# Allegro board NUCLEO-F446RE_BOOSTPACK.brd
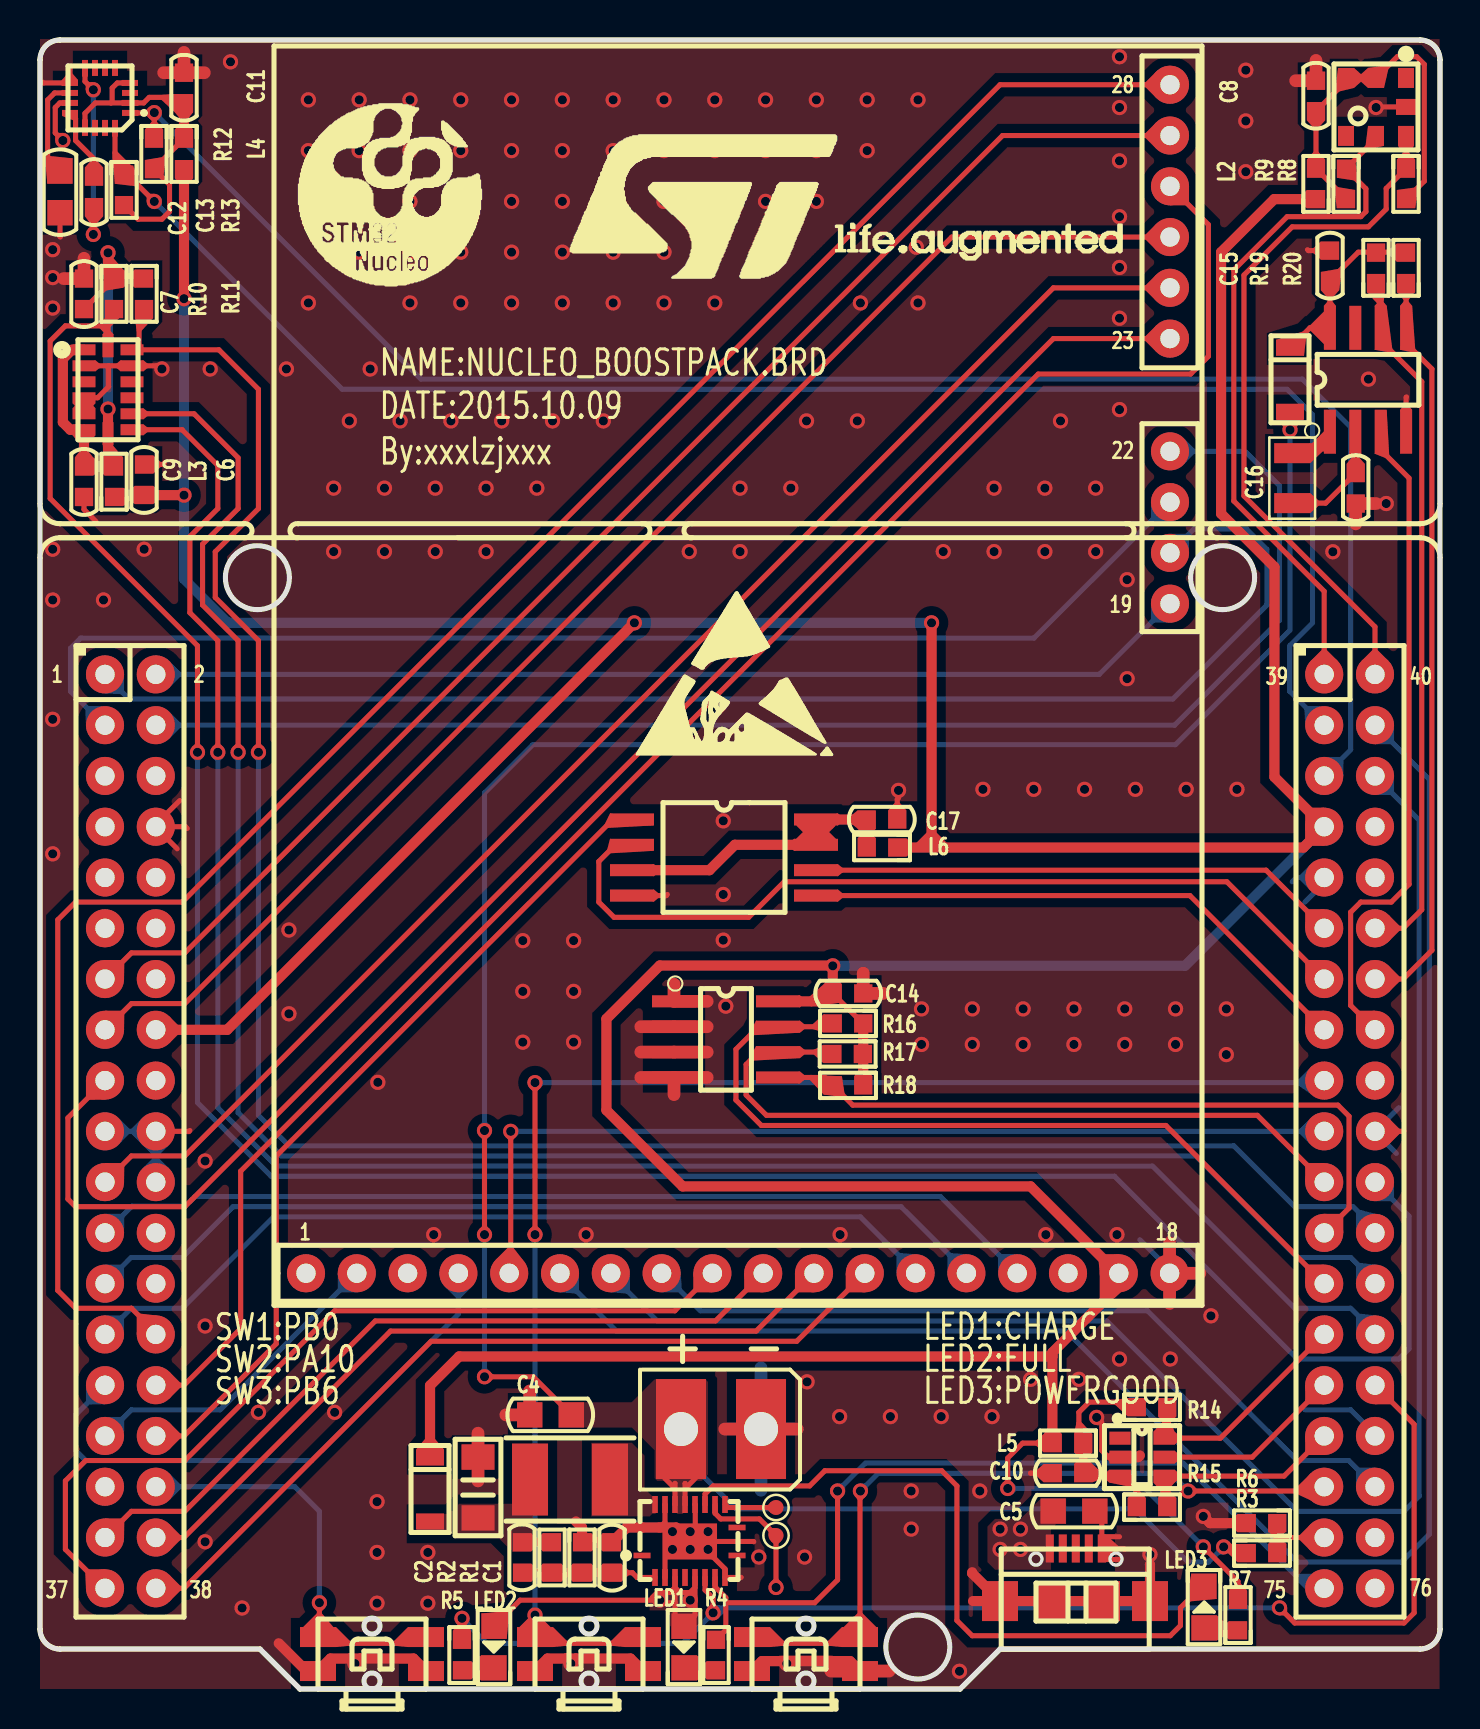
[diagram p0: board, top side]
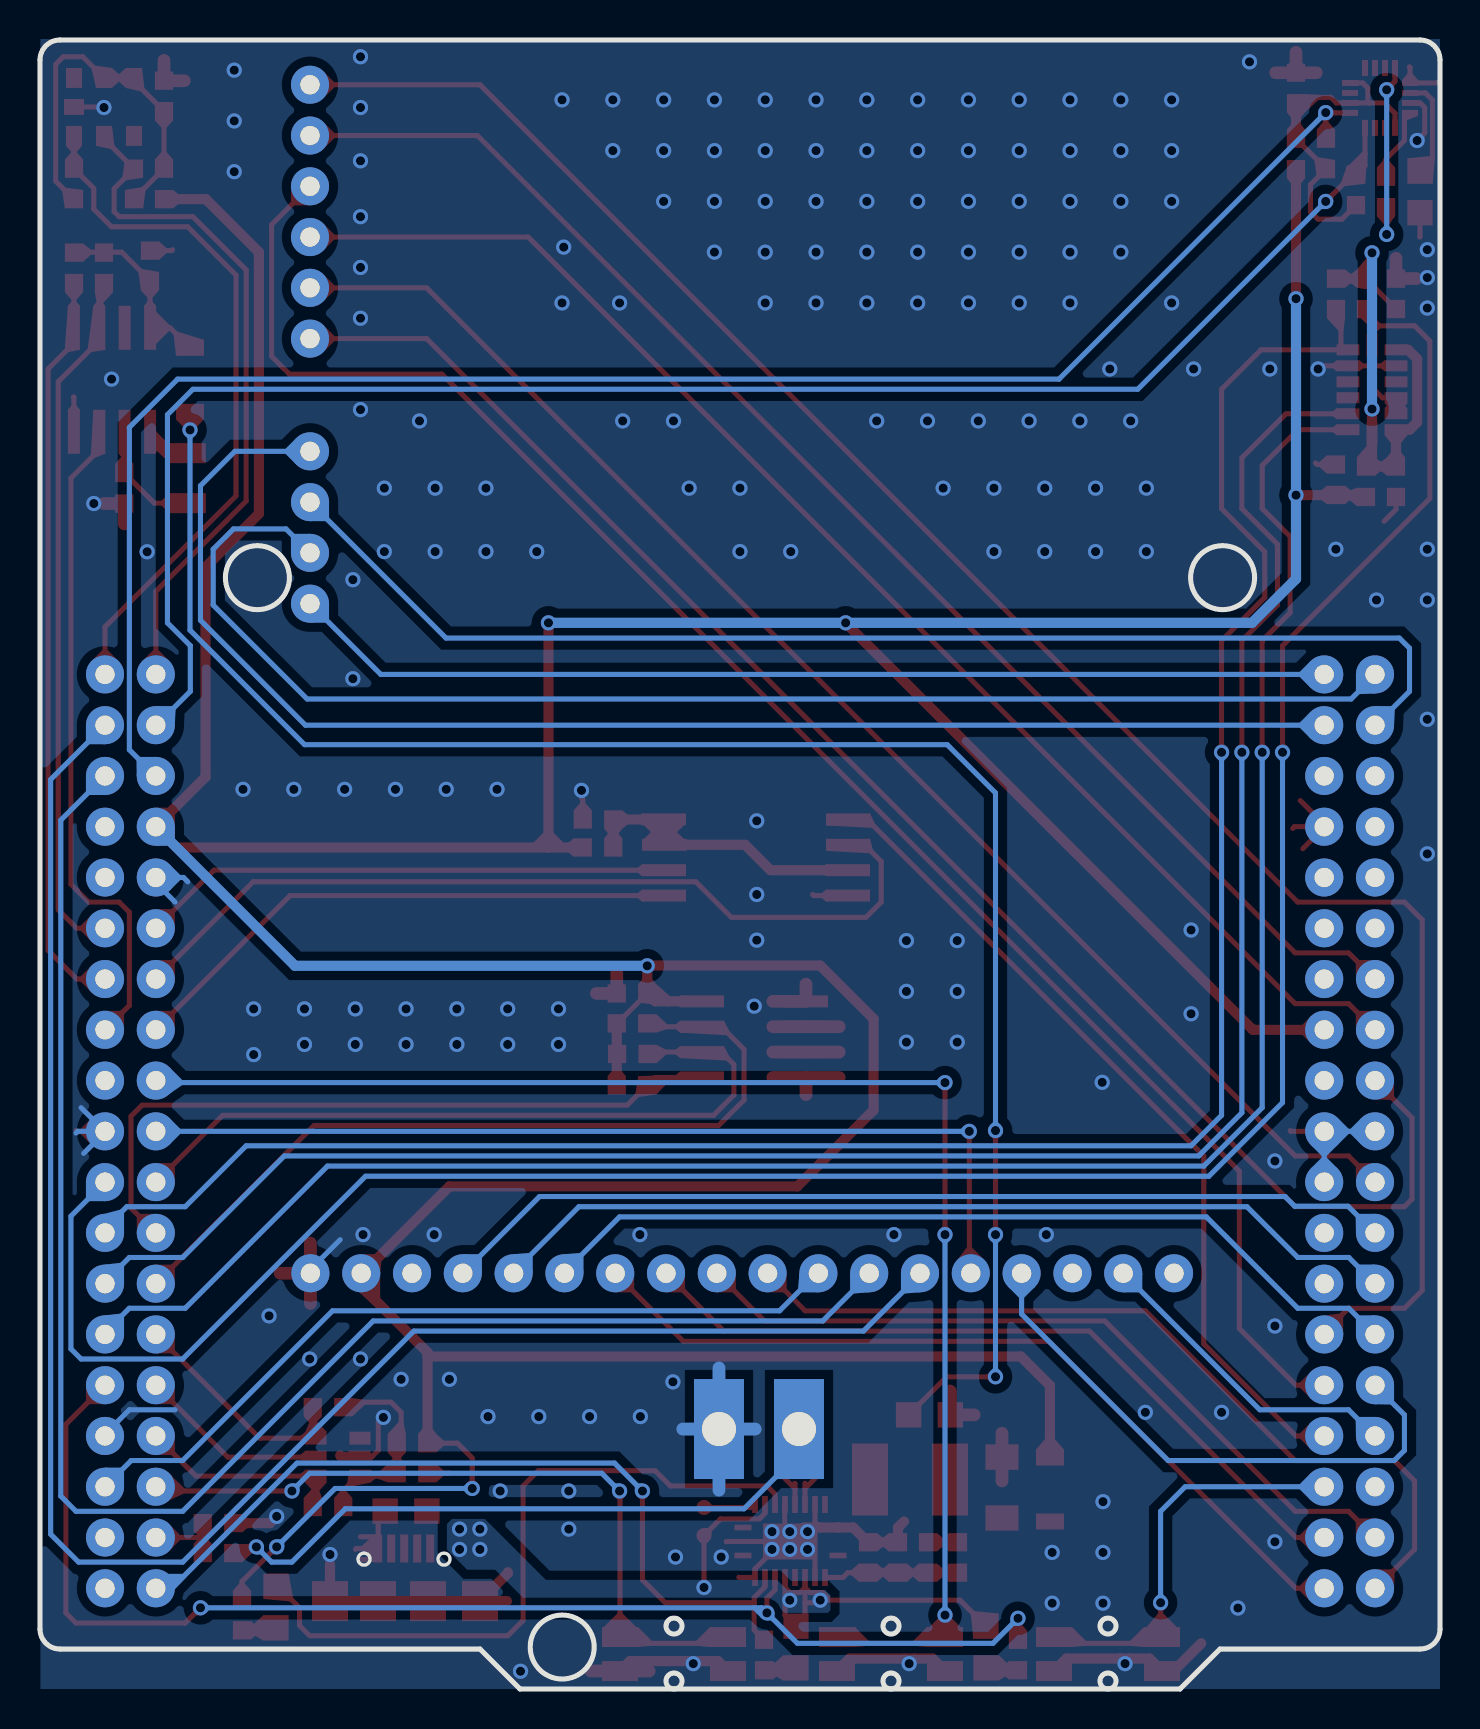
[diagram p1: board, bottom side, seen from below]

Outline 70 x 82.5 mm; copper layers: TOP, BOTTOM. Coordinates in mm from the lower left corner of the outline.
Outline path: 0,81.5 arc(0.29,82.21) 1,82.5 69,82.5 arc(69.71,82.21) 70,81.5 70,3 arc(69.71,2.29) 69,2 48,2 46,0 13,0 11,2 1,2 arc(0.29,2.29) 0,3 0,81.5

## Placement (name value [footprint] x y rotation side)
C1  100pF  [C0603]  28.6 6.58 270 top
C2  68pF  [C0603]  24.1 6.58 90 top
C3  22uF  [C1206]  21.9 10.08 0 top
C4  10uF  [C0805]  25.53 13.72 180 top
C5  10uF  [C0805]  51.7 8.9 0 top
C6  10uF  [CC0603]  5.2 60.5 270 top
C7  0.1uF  [CC0603]  2.2 69.8 270 top
C8  0.1uF  [C0603]  63.8 79.7 90 top
C9  0.1uF  [CC0603]  2.2 60.4 270 top
C10  0.1uF  [CC0603]  51.4 10.8 180 top
C11  0.1uF  [C0603]  7.2 80.1 90 top
C12  10uF  [C0805]  1 74.9 270 top
C13  0.22uF  [C0603]  2.7 74.9 270 top
C14  0.1uF  [CC0603]  40.4 34.8 0 top
C15  0.1uF  [C0603]  64.5 71.2 90 top
C16  12pF  [C0603]  65.79 60.07 90 top
C17  0.1uF  [C0603]  42.1 43.5 180 top
D1  MBRM0520  [SOD-123]  19.5 8.38 90 top
D2  MBRM0520  [SOD-123]  62.5 63.9 90 top
J1  BATTERY  [POWER2A]  30 11.98 270 top
L1  10uH  [L4532-M]  26.5 10.48 180 top
L2  BEAD  [L0603]  63.8 75.3 270 top
L3  BLM18PG600SH1  [L0603]  3.7 60.4 270 top
L4  BEAD  [L0603]  7.2 76.8 90 top
L5  BLM18PG600SH1  [L0603]  51.4 12.3 0 top
L6  BEAD  [L0603]  42.1 42.1 0 top
LED1  LED-RED  [LED0805]  32.2 2.1 270 top
LED2  LED-GREEN  [LED0805]  22.7 2.1 270 top
LED3  LED-GREEN  [LED0805]  58.2 4.1 90 top
NOREF  -  []  13 0 90 top
NOREF#2  -  []  0 3 0 top
R1  10K  [RC0603]  27.1 6.58 90 top
R2  10K  [RC0603]  25.6 6.58 270 top
R3  10K  [RC0603]  61.1 6.8 180 top
R4  10K  [RC0603]  33.8 1.7 90 top
R5  10K  [RC0603]  21.1 1.7 90 top
R6  10K  [RC0603]  61.1 8.3 0 top
R7  470R  [R0603]  59.9 3.7 270 top
R8  47K  [R0603]  68.3 75.3 90 top
R9  47K  [R0603]  65.3 75.3 90 top
R10  47K  [RC0603]  3.7 69.8 90 top
R11  47K  [RC0603]  5.2 69.8 90 top
R12  47K  [R0603]  5.7 76.8 90 top
R13  47K  [R0603]  4.2 75 90 top
R14  47K  [RC0603]  55.6 14.1 180 top
R15  47K  [RC0603]  55.6 9.1 180 top
R16  47K  [RC0603]  40.4 33.3 0 top
R17  47K  [RC0603]  40.38 31.77 0 top
R18  47K  [RC0603]  40.4 30.2 0 top
R19  4.7K  [R0603]  66.8 71.1 270 top
R20  4.7K  [R0603]  68.3 71.1 270 top
SW1  BACK  [SW-4P-5R4X4R5]  13.9 2.6 0 top
SW2  ENTER  [SW-4P-5R4X4R5]  35.6 2.6 0 top
SW3  MENU  [SW-4P-5R4X4R5]  24.75 2.6 0 top
TFT1  2.4TFT  [TFT_2_4]  11.7 19.2 0 top
TP1  TestPoint  [TP-0R75]  36.8 7.68 0 top
TP2  TestPoint  [TP-0R75]  36.8 9.08 0 top
U1  -  [NUCLEO-F446RE]  0 57.6 0 top
U2  -  [BQ25015]  30.1 5.58 0 top
U3  -  [BMP180]  68.3 80.6 180 top
U4  ADXL345  [LGA-14]  2.2 67 0 top
U5  AD7414-0  [SOT23-6]  55.1 11.6 270 top
U6  HMC5883L  [TQFN-3X3-16]  3 79.6 90 top
U7  AT24C512  [SOIC8]  34.3 32.5 270 top
U8  PCF8563  [SOIC8]  66.4 65.5 0 top
U9  W25Qxx  [SO-8-300]  34.2 41.6 270 top
USB1  MICROUSB  [USB-MICRO]  51.8 7.1 0 top
X1  32.768K  [X-2P-3R2X1R5-SMD]  62.61 60.58 90 top

## Library data of the parts
C1-C6 C8 C11-C13 C15-C17 = CAP
C7 C9 C10 = CAP1
C14 = CAP NP
D1 D2 = D SCHOTTKY
J1 = CON2
L1 L2 L4 L6 = INDUCTOR
L3 L5 = BEAD
LED1-LED3 = LED
R1-R20 = RES1
SW1-SW3 = SWITCH-SPST-4P
TFT1 = 2.4TFT
TP1 TP2 = TestPoint
U1 = NUCLEO-F446RE
U2 = BQ25015
U3 = BMP180
U4 = ADXL345_1
U5 = AD7414ARTZ-OREEL7
U6 = HMC5883
U7 = AT24C512
U8 = PCF8563
U9 = W25Qxx
USB1 = MICROUSB
X1 = XTAL

## Footprints (pads in the part's own frame, mm; a bottom-side part is the same pattern mirrored in y, then rotated)
BMP180
  rect 0.8x1 smd: 1(0,0) 2(1.5,0) 3(3,0) 4(3,2.9) 5(1.5,2.9) 6(0,2.9)
  rect 1x0.8 smd: 7(0,1.45)
BQ25015
  rect 0.85x0.28 smd: 1(0,1.1) 10(4.75,1.1) 11(4.75,2.5) 20(0,2.5)
  rect 0.28x0.85 smd: 2(0.65,0) 3(1.15,0) 4(1.65,0) 5(2.15,0) 6(2.65,0) 7(3.15,0) 8(3.65,0) 9(4.15,0) 12(4.15,3.65) 13(3.65,3.65) 14(3.15,3.65) 15(2.65,3.65) 16(2.15,3.65) 17(1.65,3.65) 18(1.15,3.65) 19(0.65,3.65)
  rect 2.7x1.8 smd: 21(2.4,1.8)
C0603
  rect 0.914x0.914 smd: 1(-0.762,0) 2(0.762,0)
C0805
  rect 1.27x1.27 smd: 1(-1.041,0) 2(1.041,0)
C1206
  rect 1.651x1.27 smd: 1(0,1.524) 2(0,-1.524)
CC0603
  rect 0.914x0.914 smd: 1(-0.762,0) 2(0.762,0)
L0603
  rect 0.914x0.914 smd: 1(-0.762,0) 2(0.762,0)
L4532-M
  rect 1.8x3.6 smd: 1(-2,0) 2(2,0)
LED0805
  rect 1.27x1.27 smd: 1(-1.041,0) 2(1.041,0)
LGA-14
  rect 1.145x0.55 smd: 1(0,0) 2(0,-0.8) 3(0,-1.6) 4(0,-2.4) 5(0,-3.2) 6(0,-4) 8(2.4,-4) 9(2.4,-3.2) 10(2.4,-2.4) 11(2.4,-1.6) 12(2.4,-0.8) 13(2.4,0)
  rect 0.55x1.145 smd: 7(1.2,-4.2) 14(1.2,0.2)
NUCLEO-F446RE
  round 1.905 hole 0.965: 1(3.25,-6.84) 2(5.79,-6.84) 3(3.25,-9.38) 4(5.79,-9.38) 5(3.25,-11.92) 6(5.79,-11.92) 7(3.25,-14.46) 8(5.79,-14.46) 9(3.25,-17) 10(5.79,-17) 11(3.25,-19.54) 12(5.79,-19.54) 13(3.25,-22.08) 14(5.79,-22.08) 15(3.25,-24.62) 16(5.79,-24.62) 17(3.25,-27.16) 18(5.79,-27.16) 19(3.25,-29.7) 20(5.79,-29.7) 21(3.25,-32.24) 22(5.79,-32.24) 23(3.25,-34.78) 24(5.79,-34.78) 25(3.25,-37.32) 26(5.79,-37.32) 27(3.25,-39.86) 28(5.79,-39.86) 29(3.25,-42.4) 30(5.79,-42.4) 31(3.25,-44.94) 32(5.79,-44.94) 33(3.25,-47.48) 34(5.79,-47.48) 35(3.25,-50.02) 36(5.79,-50.02) 37(3.25,-52.56) 38(5.79,-52.56) 39(64.21,-6.84) 40(66.75,-6.84) 41(64.21,-9.38) 42(66.75,-9.38) 43(64.21,-11.92) 44(66.75,-11.92) 45(64.21,-14.46) 46(66.75,-14.46) 47(64.21,-17) 48(66.75,-17) 49(64.21,-19.54) 50(66.75,-19.54) 51(64.21,-22.08) 52(66.75,-22.08) 53(64.21,-24.62) 54(66.75,-24.62) 55(64.21,-27.16) 56(66.75,-27.16) 57(64.21,-29.7) 58(66.75,-29.7) 59(64.21,-32.24) 60(66.75,-32.24) 61(64.21,-34.78) 62(66.75,-34.78) 63(64.21,-37.32) 64(66.75,-37.32) 65(64.21,-39.86) 66(66.75,-39.86) 67(64.21,-42.4) 68(66.75,-42.4) 69(64.21,-44.94) 70(66.75,-44.94) 71(64.21,-47.48) 72(66.75,-47.48) 73(64.21,-50.02) 74(66.75,-50.02) 75(64.21,-52.56) 76(66.75,-52.56)
POWER2A
  rect 5x2.5 hole 1.7: 1(-1.025,6.05) 2(-1.025,2.05)
R0603
  rect 0.914x0.914 smd: 1(-0.762,0) 2(0.762,0)
RC0603
  rect 0.914x0.914 smd: 1(-0.762,0) 2(0.762,0)
SO-8-300
  rect 0.6x2.2 smd: 1(-1.905,-4.6) 2(-0.635,-4.6) 3(0.635,-4.6) 4(1.905,-4.6) 5(1.905,4.6) 6(0.635,4.6) 7(-0.635,4.6) 8(-1.905,4.6)
SOD-123
  rect 0.8x1.4 smd: 1(0,0) 2(3.2,0)
SOIC8
  rect 0.6x2.2 smd: 1(-1.905,-2.6) 2(-0.635,-2.6) 3(0.635,-2.6) 4(1.905,-2.6) 5(1.905,2.6) 6(0.635,2.6) 7(-0.635,2.6) 8(-1.905,2.6)
SOT23-6
  rect 0.65x1.06 smd: 1(-0.95,-1.1) 2(0,-1.1) 3(0.95,-1.1) 4(0.95,1.1) 5(0,1.1) 6(-0.95,1.1)
SW-4P-5R4X4R5
  rect 1.8x1 smd: 1(0,0) 2(5.4,0) 3(0,-1.7) 4(5.4,-1.7)
TFT_2_4
  round 1.905 hole 0.965: 1(1.6,1.6) 2(4.14,1.6) 3(6.68,1.6) 4(9.22,1.6) 5(11.76,1.6) 6(14.3,1.6) 7(16.84,1.6) 8(19.38,1.6) 9(21.92,1.6) 10(24.46,1.6) 11(27,1.6) 12(29.54,1.6) 13(32.08,1.6) 14(34.62,1.6) 15(37.16,1.6) 16(39.7,1.6) 17(42.24,1.6) 18(44.78,1.6) 19(44.8,35.1) 20(44.8,37.64) 21(44.8,40.18) 22(44.8,42.72) 23(44.8,48.36) 24(44.8,50.9) 25(44.8,53.44) 26(44.8,55.98) 27(44.8,58.52) 28(44.8,61.06)
TP-0R75
  round 0.75 smd: 1(0,0)
TQFN-3X3-16
  rect 0.3x0.8 smd: 1(-0.75,-1.5) 2(-0.25,-1.5) 3(0.25,-1.5) 4(0.75,-1.5) 9(0.75,1.5) 10(0.25,1.5) 11(-0.25,1.5) 12(-0.75,1.5)
  rect 0.8x0.3 smd: 5(1.5,-0.75) 6(1.5,-0.25) 7(1.5,0.25) 8(1.5,0.75) 13(-1.5,0.75) 14(-1.5,0.25) 15(-1.5,-0.25) 16(-1.5,-0.75)
USB-MICRO
  rect 0.4x1.4 smd: 1(-1.31,-0.07) 2(-0.66,-0.07) 3(-0.01,-0.07) 4(0.64,-0.07) 5(1.29,-0.07)
  rect 1.8x2 smd: 6(-3.8,-2.7) 7(-1.2,-2.7) 8(1.3,-2.7) 9(3.7,-2.7)
X-2P-3R2X1R5-SMD
  rect 1x1.8 smd: 1(-1.25,0) 2(1.25,0)

## Nets
GND: C1.1 C3.1 C4.2 C5.2 C6.1 C7.1 C8.2 C9.2 C10.2 C11.2 C12.2 C14.2 C15.2 C16.1 C17.1 J1.1 R1.2 R6.1 SW1.3 SW1.4 SW2.3 SW2.4 SW3.3 SW3.4 TFT1.18(GND) U1.8(GND_1) U1.19(GND_2) U1.20(GND_3) U1.22(GND_4) U1.47(GND_5) U1.58(GND_6) U1.70(AGND) U2.3(VSS_1) U2.9(VSS_2) U2.15(C\E\) U2.18(VSS_3) U2.20(FPWM) U2.21(GND) U3.7(GND) U4.2(GND_1) U4.4(GND_2) U4.5(GND_3) U4.12(SDO/ALT) U5.2(GND) U6.9(GND_1) U6.11(GND_2) U7.1(A0) U7.2(A1) U7.3(A2) U7.4(GND) U8.4(VSS) U9.4(GND) USB1.5(GND) USB1.6(P_2) USB1.7(P_1) USB1.8(P_3) USB1.9(P_4)
VCC_3V3: C6.2 C14.1 D1.2 L2.2 L3.2 L4.1 L5.1 L6.2 R7.1 R16.2 R17.2 R18.2 TFT1.17(VCC) U1.16(3V3) U1.45(AVDD) U7.8(VCC)
VCC_BAT: C4.1 D2.1 J1.2 R3.2 U2.16(BATOUT_1) U2.17(BATOUT_2)
VCC_USB: C5.1 LED1.1 LED2.1 TP1.1 U2.4(EN) U2.6(USB) U2.13(ISET2) USB1.1(VBUS)
AD7414_ALT: U1.67(PB5) U5.5(ALERT)
AD7414_SCL: R15.1 U1.69(PB3) U5.4(SCL)
AD7414_SDA: R14.1 U1.65(PB4) U5.6(SDA)
ADC_BATTERY: R3.1 R6.2 U1.73(PA2)
ADXL345_INT1: U1.66(PB14) U4.8(INT1)
ADXL345_INT2: U1.64(PB15) U4.9(INT2)
ADXL345_SCL: R10.1 U1.60(PB2) U4.14(SCL/SCLK)
ADXL345_SDA: R11.1 U1.62(PB1) U4.13(SDA/SDIO)
AT24C512_SCL: R17.1 U1.59(PA9) U7.6(SCL)
AT24C512_SDA: R18.1 U1.61(PA8) U7.5(SDA)
AT24C512_WP: R16.1 U1.63(PB10) U7.7(WP)
BMP180_SCL: R9.2 U1.39(PC9) U3.5(SCL)
BMP180_SDA: R8.2 U1.40(PC8) U3.6(SDA)
BQ_/PG: LED3.2 U2.14(P\G\)
BQ_STAT1: R5.2 U1.68(PB13) U2.7(STAT1)
BQ_STAT2: R4.2 U1.75(PA3) U2.8(STAT2)
HMC5883L_SCL: R12.2 U1.43(PB9) U6.1(SCL)
HMC5883L_SDA: R13.2 U1.41(PB8) U6.16(SDA)
PA0: TFT1.28(PENIRQ) U1.28(PA0)
PA1: TFT1.26(BUSY) U1.30(PA1)
PA10: SW2.1 SW2.2 U1.71(PA10)
PA13: TFT1.27(DOUT) U1.13(PA13)
PA14: TFT1.25(DIN) U1.15(PA14)
PA15: TFT1.23(CLK) U1.17(PA15)
PB0: SW1.1 SW1.2 U1.34(PB0)
PB6: SW3.1 SW3.2 U1.55(PB6)
PB7: TFT1.24(CS_3) U1.21(PB7)
PC0: TFT1.12(DB0) U1.38(PC0)
PC1: TFT1.11(DB1) U1.36(PC1)
PC2: TFT1.10(DB2) U1.35(PC2)
PC3: TFT1.9(DB3) U1.37(PC3)
PC4: TFT1.8(DB4) U1.72(PC4)
PC5: TFT1.7(DB5) U1.44(PC5)
PC6: TFT1.6(DB6) U1.42(PC6)
PC7: TFT1.5(DB7) U1.57(PC7)
PC10: TFT1.20(SCK) U1.1(PC10)
PC11: TFT1.19(MISO) U1.2(PC11)
PC12: TFT1.21(MOSI) U1.3(PC12)
PC13: TFT1.15(RS) U1.23(PC13)
PC14: TFT1.14(RW) U1.25(PC14)
PC15: TFT1.13(RD) U1.27(PC15)
PCF8563_INT: U1.54(PB12) U8.3(I\N\T\)
PCF8563_SCL: R19.2 U1.50(PA12) U8.6(SCL)
PCF8563_SDA: R20.2 U1.52(PA11) U8.5(SDA)
PD2: TFT1.22(CS_2) U1.4(PD2)
PH0: TFT1.4(CS_1) U1.29(PH0)
PH1: TFT1.2(RST) U1.31(PH1)
W25QXX_CS: U1.32(PA4) U9.1(C\S\)
W25QXX_SPI_CLK: U1.49(PA5) U9.6(CLK)
W25QXX_SPI_MISO: U1.51(PA6) U9.2(DO)
W25QXX_SPI_MOSI: U1.53(PA7) U9.5(DI)
N8541817: C10.1 L5.2 R14.2 R15.2 U5.3(VDD)
N8542009: C7.2 C9.1 L3.1 R10.2 R11.2 U4.1(VDDIO) U4.6(VSUP) U4.7(C\S\)
N8544982: U8.1(OSCI) X1.2
N8545002: C16.2 U8.2(OSCO) X1.1
N8545114: C15.1 D2.2 R19.1 R20.1 U8.8(VDD)
N8545523: C17.2 L6.1 U9.3(W\P\) U9.7(H\O\L\D\) U9.8(VCC)
N8546037: C8.1 L2.1 R8.1 R9.1 U3.2(VDD) U3.3(VDDIO)
N8546671: C13.2 U6.8(SETP)
N8546679: C13.1 U6.12(SETC)
N8546727: C12.1 U6.10(C1)
N8546787: C11.1 L4.2 R12.1 R13.1 U6.2(VDD) U6.4(S1) U6.13(VDDIO)
N8551092: LED1.2 R4.1
N8551108: LED2.2 R5.1
N8551234: C1.2 C2.1 R1.1 R2.2 U2.2(FB)
N8551288: L1.1 U2.19(SW)
N8551292: C2.2 C3.2 D1.1 L1.2 R2.1
N8552167: TP2.1 U2.12(ISET1)
N85522090: LED3.1 R7.2

Pads without a net: TFT1 1 3 16; U1 5 6 7 9 10 11 12 14 18 24 26 33 46 48 56 74 76; U2 1 5 10 11; U3 1 4; U4 3 10 11; U5 1; U6 3 5 6 7 14 15; U8 7; USB1 2 3 4

## Via types
v1: diameter 0.762, hole 0.457, TOP to BOTTOM, 234 vias

## Routing (per net, layer and track width the routed paths; a pad name or vN(x,y) marks a point on that pad's centre or on a via; arc(x,y) is an arc through that point)
GND: length 168.7
  TOP w0.254: 7.49,27.94 7.45,27.9 U1.20 ; 6.1,66.17 v1(6.1,66.04) ; 30.99,8.08 31.25,8.34 31.25,9.23 U2.18 ; U6.11 0.99,79.35 0.76,79.12 0.76,77.85 v1(1.14,77.47) ; 42.93,44.58 42.86,44.51 C17.1 ; U4.5 U4.4 2.88,64.6 3.43,65.15 3.43,66.2 ; U1.8 5.79,43.1 6.86,42.04 ; U1.8 5.79,43.26 6.99,44.45 ; U1.8 7.28,43.14 7.37,43.05 ; USB1.5 53.09,7.03 53.09,6.6 53.21,6.48 53.98,6.48 ; USB1.5 54.18,7.03 54.23,6.99 ; USB1.5 53.09,7.62 ; U5.2 53.42,11.6 53.09,11.94 53.09,13.34 v1(52.83,13.59) ; 3.43,66.2 U4.2 ; 3.43,66.2 U4.12 5.81,66.2 5.84,66.17 ; v1(66.8,79.12) 66.83,79.15 U3.7 ; USB1.6 48,4.45 46.61,5.84 ; U8.4 68.3,64.62 68.33,64.64 ; 32.5,7.38 32.51,7.38 32.77,7.64 32.77,9.22 32.75,9.23 U2.15 ; C9.2 2.2,59.01 2.79,58.42 ; 53.09,7.62 53.09,8.55 C5.2 ; 53.09,7.62 53.98,7.62 ; 68.2,27.94 68.16,27.9 U1.58 ; U2.3 31.25,5.58 31.25,8.07 31.24,8.08 ; C15.2 63.42,71.96 63.37,72.01 ; C6.1 6.14,61.26 6.22,61.34 ; 0.13,80.39 0.17,80.35 U6.9 1.5,81.13 1.52,81.15 ; 35.05,5.59 35.04,5.58 U2.9 34.25,6.01 33.4,6.86 v1(33.4,6.99) 33.39,6.99 33.14,7.24 33.66,7.24 33.81,7.38 35.67,7.38 35.69,7.37 ; 31.37,39.75 31.31,39.69 U9.4 ; 0.76,41.78 v1(0.64,41.78) ; C12.2 1,72.66 1.02,72.64 ; v1(31.62,7.87) 31.8,8.05 31.8,8.08 ; C10.2 49.54,10.8 49.53,10.79 ; 46.65,4.4 46.61,4.45
  TOP w0.508: v1(58.17,8.64) 58.5,8.3 R6.1 ; 15.49,1.52 v1(15.75,1.27) 16,1.52 ; 15.49,1.52 14.52,1.52 SW1.3 13.32,0.9 11.94,2.29 ; 15.49,1.52 16,1.52 ; SW2.3 36.1,1.4 37.21,1.4 v1(37.34,1.27) 37.47,1.4 40.5,1.4 SW2.4 ; 26.8,8.38 27.1,8.08 R1.2 C1.1 29.34,8.08 30.1,8.08 ; SW3.3 25.37,1.52 26.29,1.52 ; 16,1.52 18.68,1.52 SW1.4 ; 26.8,1.52 26.29,1.52 ; 26.8,1.52 29.53,1.52 SW3.4 ; 26.8,1.52 v1(26.54,1.27) 26.29,1.52 ; U5.2 54.91,11.6 54.99,11.68 ; USB1.6 46.61,5.79 46.61,5.84 ; USB1.6 46.65,4.4 ; USB1.6 USB1.7 USB1.8 USB1.9 55.5,6.22 55.5,6.22 ; U2.21 32.5,7.38 31.8,8.08 30.1,8.08 ; 30.1,8.08 U2.20
  TOP w0.635: 30.04,33.14 U7.2 33.36,33.14 ; 62.78,80.46 C8.2 63.8,81.48 ; 31.7,29.74 U7.4 ; U7.4 30.04,30.6 ; U7.4 33.36,30.6 ; 23.29,13.72 C4.2 24.49,14.91 ; 66.8,59.31 C16.1 65.79,58.29 ; 1.18,70.56 C7.1 2.2,71.58 ; C11.2 7.2,81.88 ; C11.2 8.22,80.86 ; C11.2 6.18,80.86 ; 42.46,0.9 SW2.4 39.54,0.9 ; 34.24,13.01 J1.1 37.86,13.01 ; 41.16,35.82 C14.2 42.18,34.8 ; 30.04,31.87 U7.3 33.36,31.87 ; 21.9,10.41 C3.1 21.9,12.8 ; TFT1.18 56.48,22.31 ; TFT1.18 57.99,20.8 ; TFT1.18 56.48,19.29 ; 33.36,34.41 U7.1 31.7,35.26
  BOTTOM w0.254: U1.19 U1.20 U1.22 ; 62.61,40.39 62.82,40.6 U1.47 64.21,40.33 63.25,39.37 ; 67.82,26.8 66.75,27.86 U1.58 66.76,27.9 ; 54.99,22.48 56.48,20.99 TFT1.18 ; 66.76,27.9 68.11,27.9 68.2,27.81 ; 66.76,27.9 67.94,29.08 ; 63.25,13.97 65.53,13.97 66.75,12.75 U1.70
  BOTTOM w0.635: 36.05,9.95 J1.1 ; J1.1 36.05,16.06 ; J1.1 37.86,13.01 ; J1.1 34.24,13.01
  vias: v1(0.64,72.01) v1(0.64,70.61) v1(0.64,69.09) v1(0.64,57.02) v1(0.64,54.48) v1(0.64,48.51) v1(3.17,54.48) v1(5.21,57.02) v1(8.26,26.42) v1(8.26,18.16) v1(8.26,7.37) v1(8.51,66.04) v1(9.53,81.41) v1(10.11,4.05) v1(10.92,13.84) v1(12.32,66.04) v1(12.45,37.97) v1(12.45,33.78) v1(13.42,79.5) v1(13.42,76.96) v1(13.42,74.42) v1(13.42,69.34) v1(14.68,60.08) v1(14.68,56.9) v1(14.73,13.84) v1(15.47,63.44) v1(15.96,79.5) v1(15.96,76.96) v1(15.96,74.42) v1(15.96,71.88) v1(16.51,66.04) v1(16.89,30.35) v1(16.85,9.37) v1(16.85,6.83) v1(16.85,4.29) v1(17.22,60.08) v1(17.22,56.9) v1(18.01,63.44) v1(18.5,79.5) v1(18.5,76.96) v1(18.5,74.42) v1(18.5,71.88) v1(18.5,69.34) v1(19.39,6.83) v1(19.39,4.29) v1(19.68,22.73) v1(19.76,60.08) v1(19.76,56.9) v1(20.55,63.44) v1(21.04,79.5) v1(21.04,76.96) v1(21.04,74.42) v1(21.04,71.88) v1(21.04,69.34) v1(22.3,60.08) v1(22.3,56.9) v1(23.09,63.44) v1(23.58,79.5) v1(23.58,76.96) v1(23.58,74.42) v1(23.58,71.88) v1(23.58,69.34) v1(24.14,37.44) v1(24.14,34.9) v1(24.14,32.36) v1(24.84,60.08) v1(25.63,63.44) v1(26.12,79.5) v1(26.12,76.96) v1(26.12,74.42) v1(26.12,71.88) v1(26.12,69.34) v1(26.68,37.44) v1(26.68,34.9) v1(26.68,32.36) v1(27.3,22.73) v1(28.17,63.44) v1(28.66,79.5) v1(28.66,76.96) v1(28.66,74.42) v1(28.66,71.88) v1(28.66,69.34) v1(31.2,79.5) v1(31.2,76.96) v1(31.2,74.42) v1(31.2,71.88) v1(31.2,69.34) v1(31.62,6.99) v1(32.46,56.9) v1(32.51,7.87) v1(32.51,6.99) v1(33.4,7.87) v1(33.74,79.5) v1(33.74,76.96) v1(33.74,74.42) v1(33.74,71.88) v1(33.74,69.34) v1(34.16,43.43) v1(34.16,39.75) v1(34.16,37.47) v1(34.29,34.16) v1(35,60.08) v1(35,56.9) v1(35.94,6.6) v1(36.28,79.5) v1(36.28,76.96) v1(36.28,74.42) v1(36.28,71.88) v1(37.54,60.08) v1(38.23,6.6) v1(38.33,63.44) v1(38.35,15.37) v1(38.82,79.5) v1(38.82,76.96) v1(38.82,74.42) v1(40.01,22.73) v1(39.98,13.63) v1(40.87,63.44) v1(41.02,69.34) v1(41.36,79.5) v1(41.36,76.96) v1(42.52,13.63) v1(42.93,44.96) v1(43.56,9.91) v1(43.56,8) v1(43.81,72.14) v1(43.9,79.5) v1(43.9,69.34) v1(44.08,34.03) v1(44.08,32.25) v1(45.06,13.63) v1(45.16,56.9) v1(45.97,0.89) v1(46.62,34.03) v1(46.62,32.25) v1(46.99,9.91) v1(47.15,45.01) v1(47.6,13.63) v1(47.7,60.08) v1(47.7,56.9) v1(49.16,34.03) v1(49.16,32.25) v1(49.53,15.49) v1(49.69,45.01) v1(50.24,60.08) v1(50.24,56.9) v1(50.29,22.73) v1(51.03,63.44) v1(51.7,34.03) v1(51.7,32.25) v1(51.94,15.49) v1(52.23,45.01) v1(52.78,60.08) v1(52.78,56.9) v1(53.85,22.73) v1(53.98,81.66) v1(53.98,79.12) v1(53.98,76.45) v1(53.98,73.66) v1(53.98,71.12) v1(53.98,68.58) v1(53.98,64.01) v1(53.98,16.51) v1(54.24,34.03) v1(54.24,32.25) v1(54.36,55.5) v1(54.36,50.55) v1(54.77,45.01) v1(55.5,6.73) v1(56.52,16.51) v1(56.78,34.03) v1(56.78,32.25) v1(57.31,45.01) v1(58.55,18.67) v1(59.32,34.03) v1(59.32,31.74) v1(59.85,45.01) v1(60.29,80.99) v1(60.29,78.45) v1(60.29,75.91) v1(64.64,56.9) v1(66.42,65.53) v1(67.31,59.31)
VCC_3V3: length 311.1
  TOP w0.254: v1(58.17,7.11) 59.9,5.38 R7.1 ; 41.16,33.28 C14.1 ; L5.1 49.13,12.3 48.39,11.56 v1(48.39,10.03) ; R17.2 41.15,31.77 41.16,31.75
  TOP w0.508: R16.2 R18.2 ; L5.1 50.62,12.32 50.62,16.64 ; L3.2 3.8,59.74 C6.2 5.21,59.73 v1(7.2,59.73) ; L4.1 v1(7.2,69.56) ; U1.16 9.36,32.98 v1(29.72,53.34) ; D1.2 19.5,15.18 20.95,16.64 50.62,16.64 ; v1(44.58,53.34) 44.58,42.1 ; 44.58,42.1 63.17,42.1 U1.45 61.72,45.63 61.72,56.13 59.05,58.8 59.05,71.88 61.71,74.54 L2.2 ; 44.58,42.1 L6.2 ; U7.8 39.24,34.41 C14.1 v1(39.64,36.18) 39.62,36.2 30.99,36.2 28.32,33.53 28.32,28.96 32.13,25.15 49.53,25.15 53.88,20.8 TFT1.17 53.94,20.16 50.62,16.84 50.62,16.64
  BOTTOM w0.254: v1(58.17,7.11) 55.24,10.03 v1(48.39,10.03)
  BOTTOM w0.508: U1.45 57.25,36.18 v1(39.64,36.18) ; v1(44.58,53.34) v1(29.72,53.34) 9.4,53.34 7.2,55.54 v1(7.2,59.73) v1(7.2,69.56)
VCC_BAT: length 124.7
  TOP w0.254: D2.1 v1(62.5,62.99) ; 32.25,10.03 32.26,10.03 32.77,10.54 ; 32.25,10.03 32.25,9.23 U2.16 ; 32.25,10.03 32.25,10.28 32.26,10.29 ; v1(22.23,15.62) 24.66,15.62 C4.1 ; 31.75,10.03 31.75,10.29 31.75,10.29 ; 31.75,10.03 31.24,10.54 ; 31.75,10.03 31.75,9.23 U2.17 ; R3.2 60.03,7.11 v1(59.18,7.11) ; v1(22.23,27.94) v1(22.23,22.73)
  BOTTOM w0.254: v1(59.18,7.11) 58.42,6.35 57.4,6.35 54.74,9.02 34.8,9.02 32.05,11.76 32.05,13.01 J1.2 ; v1(22.23,27.94) 22.23,44.83 24.64,47.24 56.77,47.24 62.5,52.98 v1(62.5,62.99) ; v1(22.23,22.73) v1(22.23,15.62)
VCC_USB: length 24.2
  TOP w0.254: U2.6 32.75,5.58 32.75,5.08 ; 31.75,5.08 32,4.83 32.5,4.83 32.75,5.08 ; 31.75,5.08 31.75,5.58 U2.4 ; 31.75,5.08 31.5,4.83 30.86,4.83 30.61,4.57 ; 31.75,5.08 31.75,4.32 ; 31.75,4.32 31.75,3.59 LED1.1 32.75,3.69 32.75,5.08 ; 31.75,4.32 31.11,4.32 v1(30.99,4.45) 30.86,4.32 30.73,4.45 24,4.45 LED2.1 ; v1(36.8,5.08) TP1.1 35.97,8.51 34.04,8.51 33.75,8.79 U2.13
  vias: v1(32.51,4.45) v1(48.01,8) v1(48.01,6.99) v1(49.02,8) v1(49.02,6.99)
AD7414_ALT: length 9.5
  TOP w0.254: U1.67 60.61,11.6 U5.5
AD7414_SCL: length 10.5
  TOP w0.254: R15.1 56.2,9.26 U5.4 62.2,10.65 U1.69
AD7414_SDA: length 11.8
  TOP w0.254: R14.1 56.36,12.71 U5.6 59.02,12.55 U1.65
ADC_BATTERY: length 3.9
  TOP w0.254: 61.86,7.62 61.9,7.58 U1.73 ; 61.86,7.62 R3.1 ; 61.86,7.62 R6.2
ADXL345_INT1: length 100.9
  TOP w0.254: v1(8.89,46.86) 8.89,52.45 7.49,53.85 7.49,57.66 8.89,59.05 8.89,61.21 7.1,63 U4.8
  BOTTOM w0.254: v1(8.89,46.86) 8.89,29.08 11.81,26.16 55.63,26.16 62.74,19.05 65.53,19.05 66.75,17.83 U1.66
ADXL345_INT2: length 100.9
  TOP w0.254: v1(9.91,46.86) 9.91,52.45 8.13,54.23 8.13,57.28 9.91,59.05 9.91,61.59 7.7,63.8 U4.9
  BOTTOM w0.254: U1.64 66.75,20.37 65.53,21.59 62.87,21.59 57.78,26.67 12.06,26.67 9.91,28.83 v1(9.91,46.86)
ADXL345_SCL: length 121.5
  TOP w0.254: U4.14 3.4,68.2 ; 3.4,68.2 1.27,68.2 0.51,67.44 0.51,59.56 7.87,52.2 v1(7.87,46.86) ; 3.4,68.2 3.4,68.74 R10.1
  BOTTOM w0.254: v1(7.87,46.86) 7.87,29.34 11.56,25.65 53.72,25.65 62.87,16.51 67.94,16.51 68.45,17.02 68.45,23.66 U1.60
ADXL345_SDA: length 105.9
  TOP w0.254: 4.7,67 4.95,67.25 4.95,68.71 5.2,68.95 R11.1 ; 4.7,67 8.95,67 10.92,65.02 10.92,59.05 8.76,56.9 8.76,54.61 10.92,52.45 v1(10.92,46.86) ; 4.7,67 U4.13
  BOTTOM w0.254: v1(10.92,46.86) 10.92,28.7 12.45,27.18 59.69,27.18 62.74,24.13 65.66,24.13 66.75,23.04 U1.62
AT24C512_SCL: length 36.8
  TOP w0.254: R17.1 39.53,31.87 U7.6 35.93,31.87 35.31,31.24 35.31,29.72 36.32,28.7 60.87,28.7 U1.59
AT24C512_SDA: length 35.7
  TOP w0.254: U7.5 39.24,30.6 R18.1 39.65,30.2 40.64,29.21 64.9,29.21 65.45,28.66 65.45,24.06 U1.61
AT24C512_WP: length 41.1
  TOP w0.254: U1.63 56.3,28.19 36.07,28.19 34.8,29.46 34.8,32 35.93,33.14 U7.7 39.47,33.14 R16.1
BMP180_SCL: length 34.7
  TOP w0.254: U1.39 64.21,54.92 59.69,59.44 59.69,70.99 62.36,73.66 66.04,73.66 66.29,73.91 66.29,75.06 65.3,76.05 R9.2 66.8,77.56 U3.5
BMP180_SDA: length 35.2
  TOP w0.254: U3.6 R8.2 67.31,75.07 67.31,74.04 66.42,73.15 62.61,73.15 60.2,70.74 60.2,59.69 66.75,53.14 U1.40
BQ_/PG: length 34.9
  TOP w0.254: LED3.2 58.1,5.14 57.02,4.06 57.02,3.18 56.52,2.67 46.61,2.67 45.85,3.43 45.85,10.16 45.09,10.92 39.24,10.92 38.48,10.16 33.66,10.16 33.25,9.76 33.25,9.23 U2.14
BQ_STAT1: length 64.6
  TOP w0.254: v1(33.66,3.81) 33.66,4.55 33.25,4.95 33.25,5.58 U2.7 ; U1.68 68.71,13.24 68.71,3.81 68.2,3.3 62.74,3.3 v1(61.98,4.06) ; R5.2 v1(21.1,3.54)
  BOTTOM w0.254: v1(61.98,4.06) 33.91,4.06 v1(33.66,3.81) 32.13,2.29 22.35,2.29 v1(21.1,3.54)
BQ_STAT2: length 41.6
  TOP w0.254: 34.29,4.32 38.73,4.32 39.88,5.46 v1(39.88,9.91) ; 34.29,4.32 34.29,2.95 R4.2 ; 34.29,4.32 34.29,4.57 33.75,5.11 U2.8
  BOTTOM w0.254: v1(39.88,9.91) 41.27,11.3 57.15,11.3 63.41,5.04 U1.75
HMC5883L_SCL: length 86.9
  TOP w0.254: U6.1 5.21,78.85 5.22,78.87 v1(5.71,78.87) 5.71,77.58 R12.2
  BOTTOM w0.254: v1(5.71,78.87) 19.05,65.53 63.12,65.53 65.53,63.12 65.53,46.99 64.22,45.68 U1.43
HMC5883L_SDA: length 83.7
  TOP w0.254: v1(5.71,74.42) 4.37,75.76 R13.2 3.75,76.21 U6.16
  BOTTOM w0.254: U1.41 64.18,48.22 62.48,49.91 62.48,52.2 63.63,53.34 63.63,63.75 62.36,65.02 15.11,65.02 v1(5.71,74.42)
PA0: length 97.3
  TOP w0.254: U1.28 5.79,17.83 4.57,19.05 1.78,19.05 0.89,19.94 0.89,38.48 1.78,39.37 7.11,39.37 48,80.26 TFT1.28
PA1: length 87.9
  TOP w0.254: U1.30 7.2,15.2 10.03,18.03 10.03,25.91 49.91,65.79 57.53,65.79 58.42,66.67 58.42,73.26 TFT1.26
PA10: length 37
  TOP w0.254: SW2.1 35.63,2.6 35.94,2.29 40.69,2.29 SW2.2 41,9.88 v1(41.02,9.91) ; U1.71 64,9.91 v1(57.4,9.91)
  BOTTOM w0.254: v1(41.02,9.91) 41.91,10.79 56.52,10.79 v1(57.4,9.91)
PA13: length 70.7
  TOP w0.254: TFT1.27 48.13,77.72 7.24,36.83 4.57,36.83 3.26,35.52 U1.13
PA14: length 69.7
  TOP w0.254: U1.15 3.26,32.98 4.57,34.29 7.24,34.29 45.59,72.64 TFT1.25
PA15: length 79.9
  TOP w0.254: TFT1.23 50.67,67.56 7.24,24.13 1.78,24.13 1.4,24.51 1.4,28.57 3.25,30.43 U1.17
PB0: length 20.7
  TOP w0.254: v1(13.97,4.32) 13.97,2.67 SW1.1 13.91,2.6 14.22,2.29 18.99,2.29 SW1.2
  BOTTOM w0.254: v1(13.97,4.32) 13.97,8.89 12.74,10.12 U1.34
PB6: length 72.9
  TOP w0.254: v1(24.75,3.7) SW3.1 24.75,2.56 25.02,2.29 29.84,2.29 SW3.2 ; v1(24.75,22.73) v1(24.75,30.34)
  BOTTOM w0.254: v1(24.75,30.34) 64.11,30.34 U1.55 ; v1(24.75,3.7) v1(24.75,22.73)
PB7: length 71.8
  TOP w0.254: TFT1.24 50.67,70.1 7.24,26.67 4.57,26.67 3.26,25.36 U1.21
PC0: length 42
  TOP w0.254: TFT1.12 37.84,17.4 19.56,17.4 7.2,5.04 U1.38
PC1: length 38.4
  TOP w0.254: U1.36 7.2,7.58 17.53,17.91 35.81,17.91 TFT1.11
PC2: length 38.4
  TOP w0.254: U1.35 3.26,7.58 4.57,8.89 7.24,8.89 16.76,18.41 33.77,18.41 TFT1.10
PC3: length 42.9
  TOP w0.254: U1.37 3.22,5.04 1.27,6.99 1.27,10.41 2.29,11.43 7.24,11.43 14.73,18.92 31.74,18.92 TFT1.9
PC4: length 40.1
  BOTTOM w0.254: U1.72 65.44,11.43 62.87,11.43 55.37,18.92 33.02,18.92 31.14,20.8 TFT1.8
PC5: length 82.7
  BOTTOM w0.254: TFT1.7 28.54,20.74 30.86,18.41 53.34,18.41 62.87,8.89 68.2,8.89 68.96,9.65 68.96,43.47 U1.44
PC6: length 91.7
  BOTTOM w0.254: U1.42 69.47,45.5 69.47,7.75 68.07,6.35 62.87,6.35 51.31,17.91 28.83,17.91 26,20.74 TFT1.6
PC7: length 47.8
  TOP w0.254: TFT1.5 23.54,20.87 v1(23.54,27.9)
  BOTTOM w0.254: U1.57 v1(23.54,27.9)
PC10: length 69.1
  BOTTOM w0.254: U1.1 3.25,50.72 4.45,49.53 56.64,49.53 61.34,54.23 61.34,57.02 60.33,58.04 57.7,58.04 TFT1.20
PC11: length 52.2
  BOTTOM w0.254: U1.2 52.96,50.76 TFT1.19
PC12: length 62.6
  BOTTOM w0.254: TFT1.21 49.7,52.58 2.03,52.58 1.52,52.07 1.52,49.91 3.22,48.22 U1.3
PC13: length 48
  BOTTOM w0.254: TFT1.15 45.02,24.64 7.75,24.64 7.26,24.15 4.6,24.15 3.26,22.82 U1.23
PC14: length 46.1
  BOTTOM w0.254: U1.25 4.56,21.59 7.11,21.59 9.65,24.13 43.05,24.13 46.32,20.86 TFT1.14
PC15: length 44.2
  BOTTOM w0.254: TFT1.13 43.78,20.86 41.02,23.62 11.68,23.62 7.11,19.05 4.56,19.05 U1.27
PCF8563_INT: length 33.1
  TOP w0.254: U8.3 67.03,62 68.45,60.58 68.45,40.26 67.56,39.37 66.04,39.37 65.53,38.86 65.53,34.2 U1.54
PCF8563_SCL: length 35
  TOP w0.254: U1.50 68.16,38.06 69.09,38.99 69.09,65.41 67.03,67.46 U8.6 67.03,70.1 R19.2
PCF8563_SDA: length 37.4
  TOP w0.254: U1.52 68.16,35.52 69.6,36.96 69.6,66.04 68.3,67.33 U8.5 68.3,70.33 R20.2
PD2: length 71.3
  BOTTOM w0.254: U1.4 56.73,48.22 61.98,53.47 61.98,60.2 60.25,61.92 TFT1.22
PH0: length 28.3
  BOTTOM w0.254: U1.29 3.25,15.19 1.78,13.72 1.78,11.94 2.29,11.43 13.59,11.43 20.92,18.76 TFT1.4
PH1: length 16
  BOTTOM w0.254: U1.31 3.26,12.66 4.57,13.97 9.01,13.97 TFT1.2
W25QXX_CS: length 42.1
  TOP w0.254: U1.32 7.2,12.66 11.81,17.27 11.81,26.67 28.65,43.5 U9.1
W25QXX_SPI_CLK: length 26.6
  TOP w0.254: U1.49 61.31,40.96 U9.6
W25QXX_SPI_MISO: length 43.4
  TOP w0.254: U1.51 59.34,40.39 37.21,40.39 35.43,38.61 28.7,38.61 27.94,39.37 27.94,41.4 28.77,42.23 U9.2
W25QXX_SPI_MOSI: length 28.2
  TOP w0.254: U1.53 57.5,39.69 U9.5
N8541817: length 10.2
  TOP w0.254: R15.2 54.84,9.93 54.12,10.65 U5.3 52.31,10.65 C10.1 L5.2 51.94,12.52 51.94,13.84 52.45,14.35 54.59,14.35 R14.2
N8542009: length 24.8
  TOP w0.254: R10.2 3.7,70.54 C7.2
  TOP w0.508: v1(3.4,71.85) 3.4,70.86 R10.2 R11.2 ; U4.1 1.59,67 1.14,66.55 1.14,63.37 1.52,63 U4.6 C9.1 L3.1 3.4,61.46 U4.7 v1(3.4,64.04)
  BOTTOM w0.508: v1(3.4,71.85) v1(3.4,64.04)
N8544982: length 2.7
  TOP w0.254: U8.1 64.49,62.21 64.39,62.1 62.88,62.1 X1.2
N8545002: length 5.9
  TOP w0.254: X1.1 64.28,59.33 C16.2 65.76,60.85 U8.2
N8545114: length 9.2
  TOP w0.254: R20.1 68.28,71.88 66.8,71.88 ; R19.1 66.8,71.88 66.8,71.88 ; 66.8,71.88 65.91,71.88 64.5,70.47 C15.1 64.5,68.1 U8.8 63.5,68.1 D2.2
N8545523: length 14.9
  TOP w0.508: L6.1 C17.2 38.81,43.5 U9.8 U9.7 34.74,42.23 33.47,40.96 U9.3
N8546037: length 18.9
  TOP w0.254: R8.1 68.32,74.54 69.22,75.44 69.22,81.28 68.83,81.66 67.86,81.66 U3.2 U3.3 65.3,80.44 C8.1 L2.1 65.3,74.56 R9.1
N8546671: length 9.9
  TOP w0.254: U6.8 2.25,80.43 v1(2.67,80.01) ; v1(2.67,72.77) 2.67,74.11 C13.2
  BOTTOM w0.254: v1(2.67,80.01) v1(2.67,72.77)
N8546679: length 3.7
  TOP w0.254: C13.1 2.7,76.55 1.78,77.47 1.78,78.57 U6.12
N8546727: length 5.1
  TOP w0.254: U6.10 0.73,79.85 0.38,79.5 0.38,76.58 1,75.96 C12.1
N8546787: length 17
  TOP w0.254: L4.2 5.7,76.06 R12.1 6.48,75.26 6.48,73.91 6.1,73.53 4.9,73.53 R13.1 ; U6.4 3.86,80.35 3.61,80.1 3.61,79.4 3.56,79.35 ; C11.1 6.91,79.63 5.46,79.63 5.18,79.35 U6.2 3.56,79.35 ; 3.56,79.35 2.77,79.35 2.25,78.83 U6.13
  TOP w0.508: L4.2 C11.1
N8551092: length 1.6
  TOP w0.254: LED1.2 32.32,0.94 R4.1
N8551108: length 1.6
  TOP w0.254: LED2.2 22.58,0.94 R5.1
N8551234: length 6.7
  TOP w0.254: C2.1 R2.2 R1.1 C1.2 29.62,5.82 29.86,5.58 U2.2
N8551292: length 3.2
  TOP w0.254: L1.2 24.5,9.64 23.88,9.02 ; R2.1 C2.2
N8552167: length 2.6
  TOP w0.254: U2.12 34.4,9.08 TP2.1
N85522090: length 1.7
  TOP w0.254: LED3.1 58.32,2.94 R7.2

## Copper pours and planes (outline as drawn; the poured copper is in the pictures)
GND on TOP: 0,82.55 0,0 69.98,0 69.98,82.55 ; 50 cut-outs
GND on BOTTOM: 69.98,0 69.98,82.55 0,82.55 0,0 ; 40 cut-outs
VCC_3V3 on TOP (solid shape): 54.11,19.91 53.41,19.27 53.14,19.23 52.99,19.46 52.99,20.8 53.97,20.86
VCC_BAT on TOP: 25.91,14.35 29.59,14.35 30.73,15.49 33.27,15.49 33.4,15.37 33.4,10.54 33.27,10.41 32.77,10.41 32.38,10.03 32.38,8.76 31.62,8.76 31.62,10.03 31.24,10.41 30.86,10.41 30.73,10.54 30.73,11.94 29.59,13.08 25.91,13.08
VCC_USB on TOP (solid shape): 23.33,3.9 23.42,3.87 23.46,3.78 23.34,2.51 22.68,3.12 22.07,3.78
VCC_USB on TOP: 31.62,6.1 31.88,6.1 31.88,5.08 32,4.95 32.51,4.95 32.64,5.08 32.64,6.1 32.89,6.1 32.89,3.18 32.64,2.92 31.75,2.92 31.5,3.18 31.5,3.68 31.24,3.94 30.48,3.94 30.48,4.57 30.86,4.95 31.5,4.95 31.62,5.08
VCC_USB on TOP: 50.55,5.97 50.55,8 50.8,8.26 51.31,8.26 51.31,9.53 50.04,9.53 49.02,8.51 47.75,8.51 47.37,8.13 47.37,6.35 47.75,5.97
VCC_USB on BOTTOM: 47.75,8.51 49.4,8.51 49.66,8.26 49.66,6.99 48.64,5.97 47.24,5.97 45.85,4.57 33.53,4.57 32.77,3.81 30.61,3.81 30.48,3.94 30.48,4.7 30.73,4.95 32.64,4.95 33.15,5.46 44.7,5.46
AT24C512_SCL on TOP (solid shape): 37.02,31.89 38,31.57 35.63,31.44 35.53,31.49 35.51,31.6 35.8,32.17
AT24C512_WP on TOP (solid shape): 37.02,33.16 38,32.84 35.63,32.71 35.53,32.76 35.51,32.87 35.8,33.44
BQ_/PG on TOP (solid shape): 58.22,5.16 58.84,4.51 57.47,4.38 57.37,4.42 57.34,4.52 57.57,5.78
PCF8563_INT on TOP (solid shape): 67.46,61.7 67.42,61.6 67.31,61.57 66.73,61.8 67,63.02 67.33,64
PCF8563_SCL on TOP (solid shape): 67.62,67.01 67.59,66.91 67.49,66.87 66.73,67 66.99,68.22 67.33,69.2
PCF8563_SDA on TOP (solid shape): 68.76,67 68.73,66.91 68.64,66.87 68,67 68.27,68.22 68.6,69.2
W25QXX_CS on TOP (solid shape): 29.72,43.53 30.7,43.2 28.35,43.08 28.25,43.13 28.22,43.24 28.5,43.8
W25QXX_SPI_MISO on TOP (solid shape): 29.72,42.27 30.7,41.93 28.47,41.81 28.38,41.85 28.35,41.94 28.5,42.53
N8545114 on TOP (solid shape): 63.17,67.92 63.28,67.9 63.33,67.8 63.2,66.7 62.48,67.08 61.8,67.5
N8546727 on TOP (solid shape): 1.63,76.58 1.02,75.92 0.36,75.31 0.25,76.58 0.29,76.67 0.38,76.71
N8551288 on TOP: 27.56,12.32 29.59,12.32 30.23,11.68 30.23,10.03 30.61,9.65 30.86,9.65 30.86,8.76 30.61,8.76 30.48,8.64 27.56,8.64
N8551292 on TOP: 18.8,8.76 20.45,8.76 20.95,9.27 24.64,9.27 24.64,6.99 24.51,6.86 23.62,6.86 22.73,7.75 18.8,7.75

Small or netless copper shapes (teardrops, artwork), in the pictures only: 233 on TOP, 67 on BOTTOM

## Text on the board
Ref Des/Silkscreen Top: SW1:PB0 | SW2:PA10 | SW3:PB6 | NAME:NUCLEO_BOOSTPACK.BRD | DATE:2015.10.09 | By:xxxlzjxxx | LED1:CHARGE | LED2:FULL | LED3:POWERGOOD
DIMENSION: FIGURE | SIZE | 18.0 | 38.0 | 66.929 | DRILL CHART: TOP to BOTTOM | ALL UNITS ARE IN MILS | PLATED | QTY | 234 | 104 | 2
